# Altium PCB ECEN403_OfficialPCB.PcbDoc
Units mm, origin at the board's own origin, x right, y up, seen from the top; angles counter-clockwise.
Board outline 152.4 x 101.6 mm, 2 copper layers (Top Layer, Bottom Layer); 41 components, 39 nets, 149 pads, 20 vias.
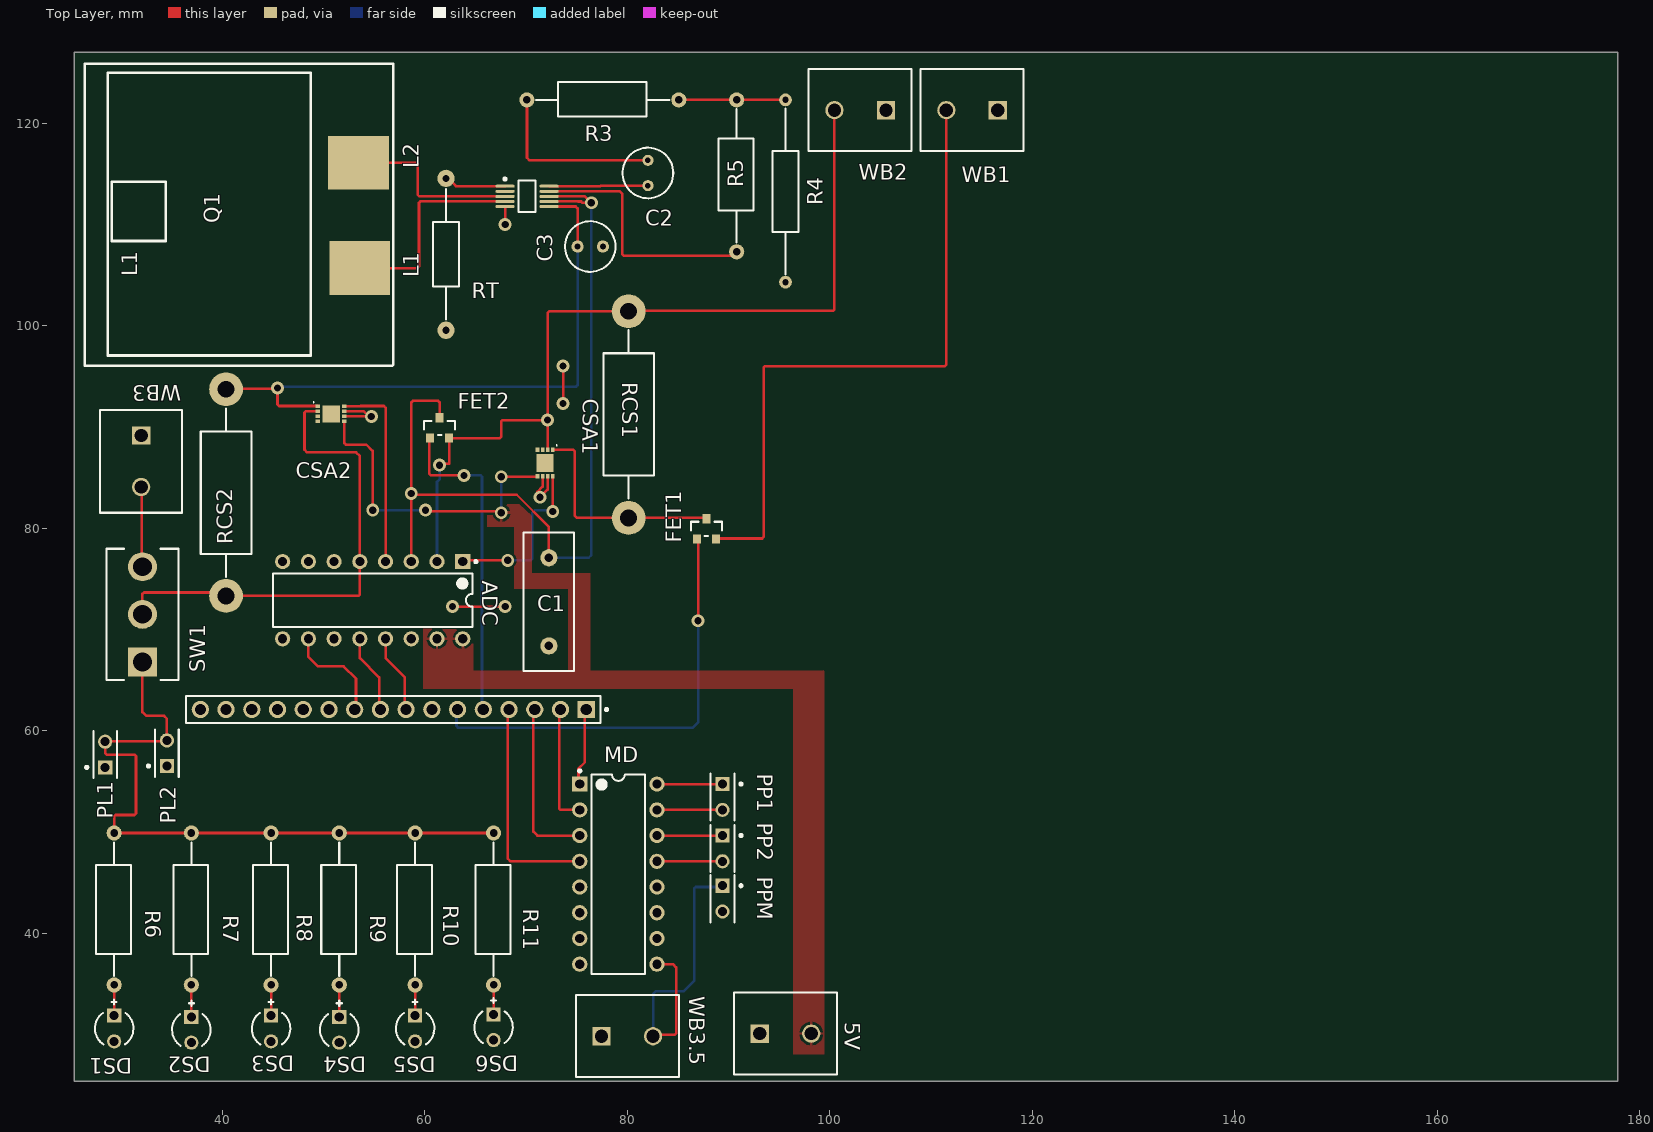
[diagram p0: Top Layer view]
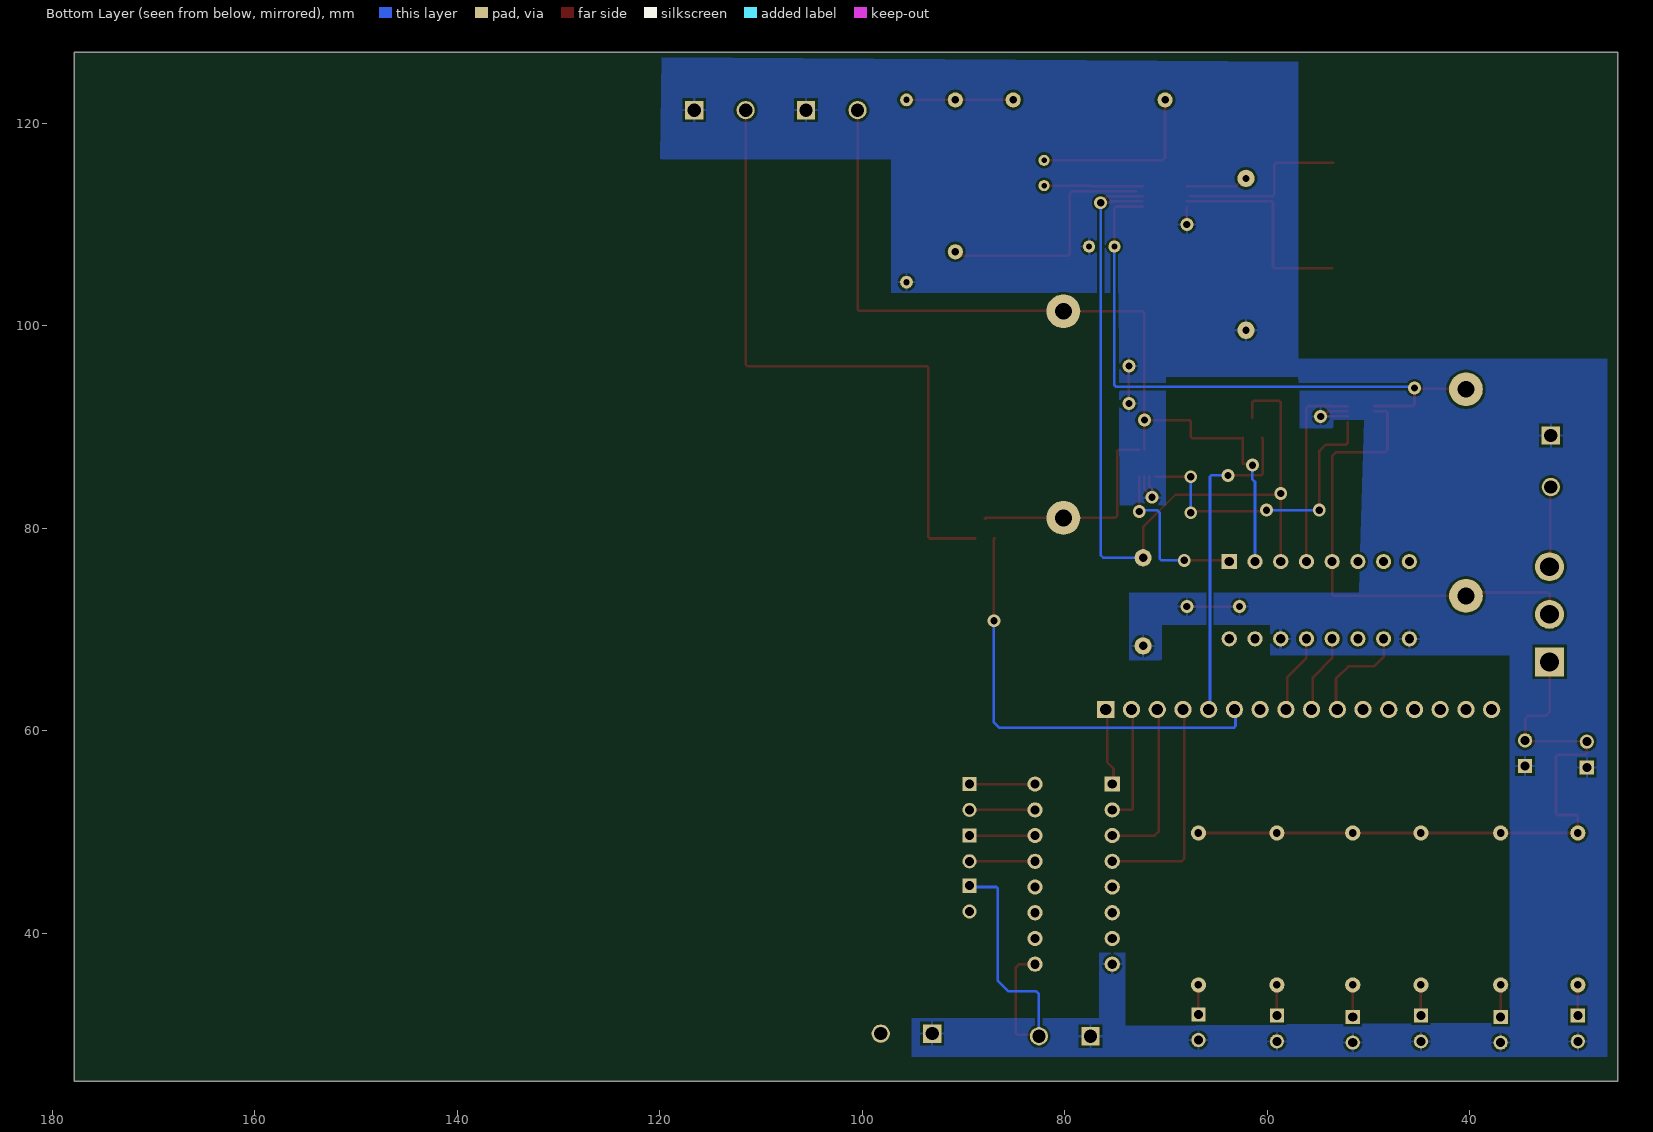
[diagram p1: Bottom Layer view, seen from below]

## Layer stack, top to bottom
Top Solder: solder mask 0.0102, Solder Resist, Dk 3.5
Top Layer: signal copper 0.0356
Dielectric 1: dielectric 0.32, FR-4, Dk 4.8
Bottom Layer: signal copper 0.0356
Bottom Solder: solder mask 0.0102, Solder Resist, Dk 3.5

## Board outline
25.4,25.4 177.8,25.4 177.8,127 25.4,127

## Design rules (kind name [scope] priority, off if disabled: settings)
Clearance [All] p1: gap=0.254 ignorepadtopadclearanceinfootprint=FALSE except(0: Arc-Hole Track-Hole SMDPad-Hole THPad-Hole Via-Hole Fill-Hole Poly-Hole Region-Hole Text-Hole; 0.15: Arc-Arc Arc-Track Arc-SMDPad Arc-THPad Track-Track Track-SMDPad Track-THPad SMDPad-SMDPad SMDPad-THPad THPad-THPad; 0.2: Arc-Via Track-Via SMDPad-Via THPad-Via Via-Via)
PolygonConnect [All] p1: connectstyle=Relief reliefconductorwidth=0.254 reliefentries=4 polygonreliefangle="90 Angle" airgapwidth=0.254
RoutingVias [All] p1: holewidth=0.711 width=1.27 viastyle="Through Hole" minholewidth=0.711 minwidth=1.27 maxholewidth=0.711 maxwidth=1.27
SilkToSolderMaskClearance [IsPad] p1: minsilkscreentomaskgap=0.03 clearancetoexposedcopper=TRUE
SolderMaskExpansion [All] p1: expansion=0.102 istentingtop=FALSE
Width [All] p1: maxlimit=0.254 minlimit=0.254 preferedwidth=0.254
29 further rules are at their usual default settings.

## Classes and differential pairs
component class ECEN403_Team_49_Schematic: 5V ADC C1 C2 C3 CSA1 CSA2 DS1 DS2 DS3 DS4 DS5 DS6 FET1 FET2 L1 MD PL1 PL2 PP1 PP2 PPM R3 R4 R5 R6 R7 R8 R9 R10 R11 RCS1 RCS2 RT SW1 WB2 WB3 WB3.5

## Components (designator, comment, footprint, x,y, rotation, side; value= is the part's Value field where it differs from the comment)
5V "1729128" "Wire To Board" 95.631,30.099 r0 top (schematic designator "5V Power Supply")
16PIN "61301611121" 16-FP-61301611121-MFG 56.896,62.103 r180 top
ADC "MCP3008-I/P" PDIP300-P16 54.864,72.898 r270 top (schematic designator "ADC Converter")
"Buck Boost" "LTC3440EMS#PBF" LT-MS-10_M 70.104,112.776 r0 top
C1 "1.5nF" "1.5nF Capacitor" 72.263,68.389 r90 top
C2 "10uF" "10uF Capacitor" 82.042,116.332 r270 top
C3 "22uF" "22uF Capacitor" 77.597,107.823 r180 top
CSA1 "Current Sense Amplifier" "Current Sense Amplifier" 71.886,86.452 r180 top
CSA2 "Current Sense Amplifier" "Current Sense Amplifier" 50.765,91.301 r270 top
DS1 "LTL-1CHE" INDPR60-254-520X380X650 29.337,30.607 r270 top
DS2 "LTL-1CHE" INDPR60-254-520X380X650 36.957,30.48 r270 top
DS3 "LTL-1CHE" INDPR60-254-520X380X650 44.831,30.607 r270 top
DS4 "LTL-1CHE" INDPR60-254-520X380X650 51.562,30.48 r270 top
DS5 "LTL-1CHE" INDPR60-254-520X380X650 59.055,30.607 r270 top
DS6 "LTL-1CHE" INDPR60-254-520X380X650 66.802,30.734 r270 top
FET1 "NTR4101PT1G" FP-318-08-MFG 87.82,79.946 r90 top
FET2 "NTR4101PT1G" FP-318-08-MFG 61.468,89.916 r90 top
L1 "10uH" "10uH Inductor" 53.594,105.697 r90 top
MD "ULN2003AN" N0016A 79.121,45.847 r0 top (schematic designator "Motor Driver")
PL1 "5-146280-2" TECO-5-146280-2_V 34.544,57.785 r90 top
PL2 "5-146280-2" TECO-5-146280-2_V 28.448,57.658 r90 top
PP1 "5-146280-2" TECO-5-146280-2_V 89.408,53.467 r270 top
PP2 "5-146280-2" TECO-5-146280-2_V 89.408,48.387 r270 top
PPM "5-146280-2" TECO-5-146280-2_V 89.408,43.434 r270 top
R3 "15K Resistor" "15k Resistor" 85.09,122.301 r180 top
R4 "200k" "200K - duplicate" 95.631,104.301 r90 top
R5 "400k" "400K Resistor" 90.805,122.301 r270 top
R6 "1k" PCBComponent_1#1 29.337,49.911 r270 top
R7 "1k" PCBComponent_1#1 36.957,49.911 r270 top
R8 "1k" PCBComponent_1#1 44.831,49.911 r270 top
R9 "1k" PCBComponent_1#1 51.562,49.911 r270 top
R10 "1k" PCBComponent_1#1 59.055,49.911 r270 top
R11 "1k" PCBComponent_1#1 66.802,49.911 r270 top
RCS1 "5m" "Current Sense" 80.137,81.026 r90 top
RCS2 "5m" "Current Sense" 40.386,93.726 r270 top
RT "60.4k" PCBComponent_1#2 62.103,99.554 r90 top
SW1 "A101SYCB04" FP-A101SYCB04-MFG 32.131,71.501 r180 top
WB1 "1729128" "Wire To Board" 114.046,121.285 r180 top
WB2 "1729128" "Wire To Board" 102.997,121.285 r180 top
WB3 "1729128" "Wire To Board" 32.004,86.614 r270 top
WB3.5 "1729128" "Wire To Board" 80.01,29.845 r0 top

## Footprints (in the part's own frame and the unit in brackets; to place one, negate y for a bottom-side part, rotate by r counter-clockwise, add the part's x,y. Pads: shape width x height; smd on the part's side, far side on the other; paste and mask are expansions set on the pad)
"1.5nF Capacitor" [mm]
  round 1.7 hole 0.85: 1(0,0) 2(8.7,0)
  silkscreen extent -2.5,-2.5 11.2,2.5
"10uF Capacitor" [mm]
  round 1.1 hole 0.55: 1(0,0) 2(2.5,0)
  silkscreen extent -1.25,-2.5 3.75,2.5
"10uH Inductor" [mm]
  rect 5.3x6 smd: 1(10.381,0.127) 2(0,0)
  silkscreen extent -9.65,-3.3 20.19,27.18
"15k Resistor" [mm]
  round 1.5 hole 0.75: 1(0,0) 2(15,0)
  silkscreen extent 0.93,-1.78 14.1,1.65
16-FP-61301611121-MFG [mm]
  rect 1.7x1.7 hole 1.1 paste-1000 mask+0: 1(-19.05,0)
  round 1.7 hole 1.1 paste-1000 mask+0: 2(-16.51,0) 3(-13.97,0) 4(-11.43,0) 5(-8.89,0) 6(-6.35,0) 7(-3.81,0) 8(-1.27,0) 9(1.27,0) 10(3.81,0) 11(6.35,0) 12(8.89,0) 13(11.43,0) 14(13.97,0) 15(16.51,0) 16(19.05,0)
  silkscreen extent -21.2,-1.35 20.47,1.35, body extent -20.57,-1.45 20.57,1.45, height 0.25
"22uF Capacitor" [mm]
  round 1.2 hole 0.6: 1(0,0) 2(2.5,0)
  silkscreen extent -1.25,-2.5 3.75,2.5
"200K - duplicate" [mm]
  round 1.26 hole 0.63: 1(0,0) 2(18,0)
  silkscreen extent 0.76,-1.27 17.14,1.27
"400K Resistor" [mm]
  round 1.5 hole 0.75: 1(0,0) 2(15,0)
  silkscreen extent 0.89,-1.78 14.1,1.65
"Current Sense" [mm]
  round 3.34 hole 1.67: 1(0,0) 2(20.4,0)
  silkscreen extent 1.91,-2.5 18.54,2.5
"Current Sense Amplifier" [mm]
  rect 0.35x0.45 smd: 1(-0.75,-1.305) 2(-0.25,-1.305) 3(0.25,-1.305) 4(0.75,-1.305) 5(0.75,1.305) 6(0.25,1.305) 7(-0.25,1.305) 8(-0.75,1.305)
  rect 1.67x1.76 smd: 9(0,0)
  silkscreen extent -1.19,-1.79 -1.09,-1.69, body extent -1.02,-1.52 1.03,1.53, height 0.75
FP-318-08-MFG [mm]
  rect 0.9x0.8 smd paste+0 mask+0: 1(-1,0.95) 2(-1,-0.95) 3(1,0)
  silkscreen extent -0.7,-1.52 0.7,1.52, body extent -1.55,-1.62 1.55,1.62, height 0.25
FP-A101SYCB04-MFG [mil]
  rect 112.37x112.37 hole 73 paste-39370.1 mask+0: 1(0,185)
  round 112.37 hole 73 paste-39370.1 mask+0: 2(0,0) 3(0,-185)
  silkscreen extent -140,-255 140,255, body extent -144,-259 144,259, height 10
INDPR60-254-520X380X650 [mm] "THD, 2-Leads, Dia 3.8mm, Pitch 2.54mm"
  rect 1.4x1.4 hole 0.9: 1(-1.27,0)
  round 1.4 hole 0.9: 2(1.27,0)
  silkscreen extent -2.87,-1.9 1.58,1.9, body extent -1.9,-1.9 1.9,1.9, height 6.5
LT-MS-10_M [mm] "SOP, 10-Leads, Body 3.1x3.1mm, Pitch 0.5mm, IPC Low Density"
  oval 1.9x0.3 smd: 1(-2.175,1) 2(-2.175,0.5) 3(-2.175,0) 4(-2.175,-0.5) 5(-2.175,-1) 6(2.175,-1) 7(2.175,-0.5) 8(2.175,0) 9(2.175,0.5) 10(2.175,1)
  silkscreen extent -2.3,-1.55 0.82,1.82, body extent -1.55,-1.55 1.55,1.55, height 1.1
N0016A [mm] "DIP, 16-Leads, Body 19.7x6.6mm, Pitch 2.54mm"
  rect 1.5x1.5 hole 0.9: 1(-3.81,8.89)
  round 1.5 hole 0.9: 2(-3.81,6.35) 3(-3.81,3.81) 4(-3.81,1.27) 5(-3.81,-1.27) 6(-3.81,-3.81) 7(-3.81,-6.35) 8(-3.81,-8.89) 9(3.81,-8.89) 10(3.81,-6.35) 11(3.81,-3.81) 12(3.81,-1.27) 13(3.81,1.27) 14(3.81,3.81) 15(3.81,6.35) 16(3.81,8.89)
  silkscreen extent -3.93,-9.85 2.65,10.31, body extent -3.95,-9.85 3.95,9.85, height 5.08
PCBComponent_1#1 [mm]
  round 1.5 hole 0.75: 1(0,0) 2(15,0)
  silkscreen extent 0.93,-1.78 14.1,1.65
PCBComponent_1#2 [mm]
  round 1.71 hole 0.7: 1(0,0) 2(15,0)
  silkscreen extent 1.08,-1.27 13.97,1.27
PDIP300-P16 [mm] "DIP, 16-Leads, Row Spacing 7.62mm, Pitch 2.54mm, Body 19.2x6.6mm"
  rect 1.5x1.5 hole 0.9: 1(-3.81,8.89)
  round 1.5 hole 0.9: 2(-3.81,6.35) 3(-3.81,3.81) 4(-3.81,1.27) 5(-3.81,-1.27) 6(-3.81,-3.81) 7(-3.81,-6.35) 8(-3.81,-8.89) 9(3.81,-8.89) 10(3.81,-6.35) 11(3.81,-3.81) 12(3.81,-1.27) 13(3.81,1.27) 14(3.81,3.81) 15(3.81,6.35) 16(3.81,8.89)
  silkscreen extent -3.93,-9.85 2.65,10.32, body extent -3.55,-9.85 3.55,9.85, height 5.34
TECO-5-146280-2_V [mm] "Connector, 2-Leads, Body 4.67x2.34mm, Pitch 2.54mm"
  rect 1.4x1.4 hole 0.89: 1(-1.27,0)
  round 1.4 hole 0.89: 2(1.27,0)
  silkscreen extent -2.33,-1.17 2.33,1.94, body extent -2.34,-1.17 2.34,1.17, height 5.33
"Wire To Board" [mm] "Receptacle, 2-Leads, Body 8.1x10.16mm, Pitch 5.08mm"
  rect 1.8x1.8 hole 1.3: 1(-2.54,0)
  round 1.8 hole 1.3: 2(2.54,0)
  silkscreen extent -5.08,-4.05 5.08,4.05, body extent -5.65,-4.05 5.08,4.05, height 10.01

## Part data
5V WB1 WB2 WB3 WB3.5: library part CMP-2000-05815-1, "PCB Terminal Block, 13.5 A, 400 V, 2-Pin THD, RoHS, Bulk", Current Rating=13500mA, Manufacturer="Phoenix Contact", Package Description="2-Pin Through Hole Device, Body 8.1 x 10.16 mm, Pitch 5.08 mm", Package Reference=1729128-2, Package Version=03/2015, Voltage Rating=400V, Datasheet URL=https://datasheet.ciiva.com/16046/1729128-16046181.pdf, Datasheet Version=12/2013, Manufacturer URL=http://www.phoenixcontact.com/, Mounting Technology=ThroughHole, No. of Positions=2, No. of Rows=1, Orientation=Horizontal, Package URL=https://www.phoenixcontact.com/online/portal/pi/pxc/product_detail_page/!ut/p/b1/3VdJjqNKFDxLH8AFycySyWY2ozFsEPOMMQaDOX1XedGL_1Vdm5YXJleknhSKeBkvI6EA8ncAo3AYoDhBQGco6KN7VURTdemj9us_IEKEZo_YHiPAEWEFmDGOHMORkqKYCORBZxgL7ZoaZYcbFFUZ3fqxSY6GOuxydWUuHqz1ynmMFygu583Bob0Ewr6Sd_l-5m-kAueHiB0jpRwZwe58wwtkpxtMYd_LmGcDRU02dRNEyWt6Y2ti5pSyJ_reIkzIulrqApdnbT11V5jnCKbYNCvhEM1MCpPByat_X379-iThf08CI5GfOPqfBeS3BRoBOdD55AKVv0iLwCMq-2BrzXWSGRH7pUGD9uwXQjiph3xL0DKQwdGa0JImiIOmBNOestqgwTHSSs2oOep-78apyXQBvNi8ZLaFjvjWvcaUEBu0MC6Wbe-d6mB0FAebo2lUWinqYaZs5DAYzV0RP9yitUjnGJ0iI9xhZkT42OCQNUJJhkgWINNQLP2JFP6OpMg3JCVg70jqHT0lvKOnhHf0lPuOnnLf0VPuWx6_dxwUIvwk5WMkT0kLL1mh61l2yZVSzG3pYV_bqo-mj6uMKwKwdnnW8Jh5RTOJzMOA5c-eJDaZQw4mTMPH02PvS_ZAqNVjVTo2WyYLkwH_KU1mmmG5kjRhDqPXLwwVHvVOjCM60-fpXvTDfMGW1PVFVS1r4e4yVDk4ZdNbkUHvqPqQSeian4UD39fNKmachqdJ1NJbyk8rXT9mXTvPk3oE5meulKGgiruPJek-4I9hTT6G8ZLOyRSm2RRVbThERQad5OS28hdt4YW4vG0stgYYzsWsK4_7y6DZMjJSCqri1kyiZR5vD7pwIrNR7QwPHTcLTI5qT7eRlpHrdGiupYlqQDJ7zy_CND8fWWBoLRXxk1RVcXiBQwbTD4Xi7KL-FuO94t9xaqweXzH, Packing=Bulk, PartNumber=1729128, Pitch=5.08mm, RoHS=TRUE
16PIN: library part CMP-1502-01095-2, "CONN HEADER VERT 16POS 2.54MM", Color=Black, Flammability Rating="UL94 V-0", Max Operating Temperature=105°C, Min Operating Temperature=-40°C, Voltage Rating=250V, Connector Type=Header, Contact Finish - Mating=GOLD, Contact Material="Copper Alloy", Contact Mating Length=0.236inch, Contact Plating=Gold, Contact Shape=Square, Contact Type="Male Pin", Fastening Type=Pull, Gender=Male, Insulation Color=Black, Insulation Material=Nylon, Mount="Through Hole", Number of Contacts=16, Number of Positions=16, Number of Rows=1, Packaging=Bulk, Pitch=0.1inch, RoHS Compliant=Yes, Series=WR-PHD, Termination=Solder
ADC: library part CMP-0188-00184-2, "2.7V 4-Channel/8-Channel 10-Bit A/D Converters with SPI Serial Interface, 16-Pin PDIP, Industrial Temperature", Code_JEDEC=MS-001-BB, ComponentLink1Description="Manufacturer URL", ComponentLink1URL=http://www.microchip.com/, ComponentLink2Description=Datasheet, ComponentLink2URL=http://ww1.microchip.com/downloads/en/DeviceDoc/21295d.pdf, ComponentLink3Description="Package Specification", ComponentLink3URL=http://www.microchip.com/stellent/groups/techpub_sg/documents/packagingspec/en012702.pdf, DatasheetVersion="revD, Dec-2008", PackageDescription="16-Lead Plastic Dual In-Line (P) - 300 mil Body [PDIP]", PackageReference=PDIP300-P16, PackageVersion="revBB, Aug-2009", RevisionNote="URLs added."
"Buck Boost": library part CMP-0492-01290-1, "Micropower Synchronous Buck-Boost DC/DC Converter, 10-pin SOP (MS-10), -40 to 85 degC, Pb-Free", Frequency Sync Range="300kHz - 2MHz", Manufacturer="Linear Technology", ComponentLink1Description="Manufacturer URL", ComponentLink1URL=http://www.linear.com/, ComponentLink2Description=Datasheet, ComponentLink2URL=http://cds.linear.com/docs/en/datasheet/3440fb.pdf, ComponentLink3Description="Package Specification", ComponentLink3URL=http://cds.linear.com/docs/en/packaging/05081661_F_MS.pdf, DatasheetVersion="Rev. B", Mounting Technology="Surface Mount", Number of Outputs=1, PackageDescription="10-Pin Plastic MSOP, Body 3 x 3 mm, Pitch 0.5 mm", PackageReference=MS-10, PackageVersion="Rev. E, 06/2010", PartNumber=LTC3440EMS#PBF, RoHS=TRUE
C2: library part "10uF Capacitor"
C3: library part "22uF Capacitor"
DS1 DS2 DS3 DS4 DS5 DS6: library part CMP-1674-00005-1, "Radial LED, 12.6 mcd, 20 mA, 2 V, -55 to 100 degC, 2-Pin THD, RoHS, Bulk", Case\Package=Radial, Current Rating="3.6 A", Max Operating Temperature="130 degC", Min Operating Temperature="-40 degC", Package Quantity=55, Resistance="0.045 Ohm", Tolerance=20%, ComponentLink1Description="Manufacturer URL", ComponentLink1URL=http://www.us.liteon.com/, ComponentLink2Description=Datasheet, ComponentLink2URL=https://datasheet.ciiva.com/15117/getdatasheetpartid-187746-15117985.pdf, DatasheetVersion=Dec-03, Height="1.1 inch", Lead Pitch="11.44 mm", Length="0.97 inch", Mount="Through Hole", PackageDescription="2-Pin Through Hole Device, Dia 3.8 mm, Pitch 2.54 mm", PackageReference=LTL-1CHE, Packaging=Tray, Radiation Hardening=No, RoHSCompliant=true, Shielding=Unshielded, Width="0.62 inch"
FET1 FET2: library part CMP-1058-00754-2, "MOSFET P-CH 20V 1.8A SOT-23", Case/Package=SOT-23-3, Continuous Drain Current (ID)=-3.2A, Drain to Source Breakdown Voltage=-20V, Drain to Source Resistance=112mR, Drain to Source Voltage (Vdss)=20V, Gate to Source Voltage (Vgs)=8V, Input Capacitance=675pF, Max Operating Temperature=150°C, Max Power Dissipation=730mW, Min Operating Temperature=-55°C, On-State Resistance=70MR, Package Quantity=1, Threshold Voltage=-720mV, Contact Plating=Tin, Current Rating=-3.2A, Element Configuration=Single, Fall Time=12.6ns, Height=0.94mm, Lead Free="Lead Free", Length=2.9mm, Nominal Vgs=-720mV, Number of Elements=1, Number of Pins=3, Packaging="Tape and Reel", Power Dissipation=730mW, Radiation Hardening=No, Rds On Max=85mR, REACH SVHC="No SVHC", Rise Time=12.6ns, Turn-Off Delay Time=30.2ns, Turn-On Delay Time=7.5ns, Voltage Rating (DC)=-20V, Width=1.3mm
L1: library part "10uH Inductor"
MD: library part CMP-2000-07352-1, "High-Voltage, High-Current Darlington Transistor Array, 50 V, 500 mA, -20 to 70 degC, 16-Pin PDIP (N), Pb-Free (RoHS), Tube", Manufacturer=TexasInstruments, Maximum Collector Emitter Saturation Voltage=1.1@100mA|1.3@200mA|1.6@350mAV, Maximum Collector Emitter Voltage=50V, Package=16PDIP, Package Description="16-Pin Plastic In-Line, Body 19.305 x 6.35 mm, Pitch 2.54 mm", Package Reference=N16, Package Version="4040049/E, 12/2002", Peak DC Collector Current=0.5A, Category=DarlingtonBJT, Configuration=Array7, Datasheet URL=http://www.ti.com/general/docs/lit/getliterature.tsp?genericPartNumber=uln2003a&fileType=pdf, Datasheet Version="Rev. O, 01/2016", Manufacturer URL=http://www.ti.com/, Mounting=ThroughHole, Mounting Technology=ThroughHole, Package URL=http://www.ti.com/litv/pdf/mpdi002c, Packaging=Rail/Tube, Rad Hard=No, Type=NPN
PL1 PL2 PP1 PP2 PPM: library part CMP-2000-07492-1, "Male Header, Pitch 2.54 mm, 1 x 2 Position, Height 8.21 mm, Tail Length 3.05 mm, -65 to 105 degC, RoHS, Bulk", Case\/Package=100, Colour=Black, Current Rating=3A, Flammability Rating=UL94V-0, High Temperature Housing=Yes, Manufacturer="TE Connectivity", Max Current Rating=5A, Max Operating Temperature=105degC, Min Operating Temperature=-65degC, Package Description="Male Header, Pitch 2.54 mm, 1 x 2 Position, Height 8.21 mm, Tail Length 3.05 mm", Package Quantity=500, Approvals=CSA, Board Standoff=No(Without), Connector Type=Header, Contact Gender=Male, Contact Material=CopperAlloy, Contact Mating Length=0.23inch, Contact Plating=Matte, Contact Protection=No(Without), Contact Shape=Square, Datasheet URL=http://www.te.com/commerce/DocumentDelivery/DDEController?Action=showdoc&DocId=Customer+Drawing%7F146280%7FH1%7Fpdf%7FEnglish%7FENG_CD_146280_H1.pdf%7F5-146280-2, Datasheet Version="Rev. H1, 08/2016", Depth=2.34mm, Gasket=No(Without), High Speed Serial Data Connector=No, Housing Colour=Black, Housing Material=Polymer, Keyed=No, Length=4.67mm, Manufacturer URL=http://www.te.com/, Mating Alignment=No(Without), Mating Connector Lock=No(Without), Mating Post Length=0.23inch, Mount=ThroughHole, Mounting Technology=ThroughHole, Number of Contacts=2, Number of Positions=2, Number of Rows=1, Orientation=Straight, Package Reference=5-146280-2, Packaging=Carton, Panel Mount Retention=No(Without), PCB Mount Retention=Without, PCB Mounting Orientation=Vertical, PCB Thickness=0.063inch, Pitch=2.54mm, Radiation Hardening=No, RoHSCompliant=true, Row Spacing=2.54mm, Selectively Loaded=No(Without), Stabilizers=No(Without), Termination=ThroughHole, Termination Post Length=0.12inch
R4: library part "200k Resistor"
R5: library part "400k Resistor"
R6 R7 R8 R9 R10 R11: library part "1k Resistor"
RCS1 RCS2: library part "Current Sense Resistor"
RT: library part "60.4k Resistor"
SW1: library part CMP-03408-000017-1, "SWITCH TOGGLE SPDT 0.4VA 20V", Actuator Color=Chrome, Contact Current Rating=400mA, Contact Resistance=10mR, Flammability Rating="UL94 V-1", Insulation Resistance=30MR, Max Operating Temperature=85°C, Max Voltage Rating (AC)=20V, Min Operating Temperature=-30°C, Package Quantity=100, Power Rating=400mW, Actuator Length=10.41mm, Actuator Material=Phenolic, Actuator Type="Standard Round", Contact Material=Copper, Contact Plating=Gold, Depth=6.86mm, Electrical Life=6000Cycles, ELV=Compliant, Illumination Type=Non-Illuminated, Lead Free="Lead Free", Max Voltage Rating (DC)=20V, Mount=Panel, Number of Poles=1, Number of Positions=2, Orientation=Straight, Packaging=Bulk, Radiation Hardening=No, REACH SVHC="No SVHC", RoHS Compliant=Yes, Series="Gemini A", Switch Function=On-On, Termination="PC Pins", Throw Configuration=SPDT, Voltage Rating (AC)=20V, Voltage Rating (DC)=20V

## Via types
v1: diameter 1.27, hole 0.711, Top Layer to Bottom Layer, 19 vias
v2: diameter 1.27/1.27 (per signal layer), hole 0.711, Top Layer to Bottom Layer, 1 vias

## Nets (pads, with @x,y where several pads share a name; then routed paths per layer and width w, separated by ;. In a path a pad name is that pad's centre, name@x,y a point inside that pad or via, vN(x,y) a via of type N, cw(c..) or ccw(c..) an arc to the next point about the centre after c; other vN are vias at no path point)
5V: 5V.2 ADC.15 ADC.16 CSA1.5 CSA2.5 | length 30.8
  Top Layer w0.254: CSA2.5@52.07,90.456 52.07,88.414 52.219,88.265 54.229,88.265 54.864,87.63 v1(54.864,81.788) ; v1(60.071,81.788) 60.198,81.661 67.437,81.661 v1(67.564,81.534) ; v1(67.564,85.09) CSA1.5@71.001,85.09
  Bottom Layer w0.254: v1(54.864,81.788) v1(60.071,81.788) ; v1(67.564,81.534) v1(67.564,85.09)
GND: 5V.1 "Buck Boost.5" ADC.9 ADC.14 C1.1 C3.1 CSA1.6 CSA1.7 CSA2.6 CSA2.7 DS1.2 DS2.2 DS3.2 DS4.2 DS5.2 DS6.2 MD.8 PL1.1 PL2.1 R4.1 RT.1 WB1.1 WB2.1 WB3.1 WB3.5.1 | length 21
  Top Layer w0.254: DS4.2@51.498,29.273 DS4.2 DS4.2@51.625,29.273 ; CSA2.6 v1@54.491,91.051 ; CSA2.7@52.084,91.543 53.999,91.543 v1@54.491,91.051 ; v1(54.729,91.051) v1@54.491,91.051 ; DS5.2@58.991,29.273 DS5.2 ; v1(62.738,72.263) v1(67.945,72.263) ; DS6.2@66.484,29.146 DS6.2@66.548,29.21 ; v1(67.945,109.982) 67.945,111.677 ; CSA1.6 71.636,84.103 71.12,83.587 71.374,83.333 v1(71.374,83.058) 72.132,83.816 CSA1.7@72.132,85.147 ; v1(73.66,92.329) v1(73.66,96.012)
Net16PIN_1: 16PIN.1 MD.1 | length 8.1
  Top Layer w0.254: MD.1 75.184,54.864 75.184,56.261 75.819,56.896 16PIN.1@75.819,62.484
Net16PIN_2: 16PIN.2 MD.2 | length 12.2
  Top Layer w0.254: 16PIN.2@73.279,62.484 73.279,52.346 73.428,52.197 MD.2
Net16PIN_3: 16PIN.3 MD.3 | length 17.2
  Top Layer w0.254: 16PIN.3@70.739,62.484 70.739,50.038 71.12,49.657 MD.3
Net16PIN_4: 16PIN.4 MD.4 | length 22.3
  Top Layer w0.254: 16PIN.4@68.199,62.484 68.199,47.371 68.453,47.117 MD.4
Net16PIN_5: 16PIN.5 FET2.1 | length 31.5
  Top Layer w0.254: FET2.1 60.452,88.85 60.452,85.366 60.601,85.217 v1(63.881,85.217)
  Bottom Layer w0.254: v1(63.881,85.217) 65.278,85.217 65.3,85.239 65.51,85.239 65.659,85.09 16PIN.5@65.659,62.484
Net16PIN_6: 16PIN.6 FET1.1 | length 44.3
  Top Layer w0.254: FET1.1@86.934,79.01 86.995,78.949 v2(86.995,70.866)
  Bottom Layer w0.254: 16PIN.6@63.119,62.484 63.137,62.466 63.137,60.474 63.286,60.325 86.487,60.325 86.995,60.833 v2(86.995,70.866)
Net16PIN_8: 16PIN.8 ADC.13 | length 7.6
  Top Layer w0.254: ADC.13 56.134,67.183 58.039,65.278 16PIN.8@58.039,62.484
  Bottom Layer w0.254: ADC.13@56.007,68.961 ADC.13
Net16PIN_9: 16PIN.9 ADC.12 | length 7.6
  Top Layer w0.254: ADC.12 53.594,67.183 55.499,65.278 16PIN.9@55.499,62.484
  Bottom Layer w0.254: ADC.12@53.467,68.961 ADC.12
Net16PIN_10: 16PIN.10 ADC.10 | length 10.1
  Top Layer w0.254: ADC.10 48.514,67.312 49.464,66.362 52.002,66.362 53.213,65.151 53.213,62.738 16PIN.10@52.959,62.484
"NetADC Converter_1": ADC.1 CSA1.8 | length 17.2
  Top Layer w0.254: ADC.1 63.881,76.835 v1(68.199,76.835) ; CSA1.8 72.64,85.143 72.64,81.665 v1(72.644,81.661)
  Bottom Layer w0.254: v1(68.199,76.835) 70.463,76.835 70.612,76.984 70.612,81.512 70.888,81.788 72.517,81.788 v1(72.644,81.661)
"NetADC Converter_2": ADC.2 CSA1.2 FET2.2 RCS1.2 WB2.2 | length 86.2
  Top Layer w0.254: v1(61.468,86.233) 61.617,86.382 62.418,86.382 FET2.2 62.434,88.9 67.415,88.9 67.564,89.049 67.564,90.297 67.542,90.319 67.542,90.529 67.691,90.678 v1(72.136,90.678) ; CSA1.2 v1(72.136,90.678) ; WB2.2 100.457,101.622 100.308,101.473 80.184,101.473 RCS1.2 72.285,101.426 72.136,101.277 v1(72.136,90.678)
  Bottom Layer w0.254: ADC.2 61.214,84.582 61.468,84.836 v1(61.468,86.233)
"NetADC Converter_3": "Buck Boost.7" "Buck Boost.8" ADC.3 C1.2 FET2.3 | length 85.8
  Top Layer w0.254: ADC.3 v1(58.674,83.439) ; FET2.3 61.468,92.434 61.319,92.583 58.823,92.583 58.674,92.434 v1(58.674,83.439) ; C1.2 72.263,80.137 69.088,83.312 58.801,83.312 v1(58.674,83.439) ; 72.279,112.776 75.819,112.776 v1(76.454,112.141) 75.565,112.141 75.438,112.268 75.135,112.268 75.119,112.284 72.369,112.284
  Bottom Layer w0.254: C1.2 76.2,77.089 76.454,77.343 v1(76.454,112.141)
"NetADC Converter_4": ADC.4 CSA2.8 | length 19.3
  Top Layer w0.254: CSA2.8 53.651,92.051 53.675,92.075 55.961,92.075 56.134,91.902 ADC.4
"NetADC Converter_5": ADC.5 CSA2.2 RCS2.2 SW1.2 | length 48.6
  Top Layer w0.254: SW1.2@32.385,71.755 SW1.2 32.131,73.511 32.28,73.66 40.052,73.66 RCS2.2 53.445,73.326 53.594,73.475 ADC.5 53.594,87.122 53.213,87.503 48.387,87.503 48.133,87.757 48.133,91.418 48.282,91.567 49.444,91.567 CSA2.2 ; RCS2.2@41.108,72.397 RCS2.2@41.148,72.357
"NetBuck Boost_1": "Buck Boost.1" RT.2 | length 6.2
  Top Layer w0.254: RT.2 62.295,114.554 63.073,113.776 67.929,113.776 67.92,113.785
"NetBuck Boost_3": "Buck Boost.3" L1.1 | length 17.2
  Top Layer w0.254: L1.1 59.16,116.078 59.309,115.929 59.309,112.933 59.458,112.784 67.588,112.784
"NetBuck Boost_4": "Buck Boost.4" L1.2 | length 20.7
  Top Layer w0.254: L1.2 59.287,105.697 59.436,105.846 59.436,112.127 59.585,112.276 67.929,112.276
"NetBuck Boost_6": "Buck Boost.6" C3.2 CSA2.1 RCS2.1 | length 60.9
  Top Layer w0.254: RCS2.1 40.45,93.789 45.402,93.789 v1(45.466,93.853) 45.466,92.224 45.615,92.075 CSA2.1@49.46,92.075 ; 72.279,111.776 74.908,111.776 75.097,111.587 C3.2
  Bottom Layer w0.254: v1@45.466,93.98 74.948,93.98 75.097,94.129 C3.2
"NetBuck Boost_9": "Buck Boost.9" R5.2 | length 24.3
  Top Layer w0.254: 72.927,113.284 79.257,113.284 79.502,113.039 79.502,107.069 79.651,106.92 R5.2@91.059,106.92
"NetBuck Boost_10": "Buck Boost.10" C2.2 | length 9.8
  Top Layer w0.254: 72.279,113.776 72.295,113.792 77.352,113.792 77.392,113.832 C2.2
NetC2_1: C2.1 R3.2 | length 17.8
  Top Layer w0.254: R3.2 70.104,122.287 70.104,116.586 70.358,116.332 C2.1
NetCSA1_1: CSA1.1 FET1.3 RCS1.1 | length 21.8
  Top Layer w0.254: CSA1.1 74.654,87.757 74.803,87.608 74.803,81.28 75.057,81.026 RCS1.1 87.868,81.026 87.884,81.01 FET1.3
NetDS1_1: DS1.1 R6.2 | length 3
  Top Layer w0.254: DS1.1 R6.2
NetDS2_1: DS2.1 R7.2 | length 3.2
  Top Layer w0.254: DS2.1 R7.2
NetDS3_1: DS3.1 R8.2 | length 3
  Top Layer w0.254: DS3.1 R8.2
NetDS4_1: DS4.1 R9.2 | length 3.3
  Top Layer w0.254: R9.2 DS4.1 DS4.1@51.689,31.877
NetDS5_1: DS5.1 R10.2 | length 3
  Top Layer w0.254: DS5.1 R10.2
NetDS6_1: DS6.1 R11.2 | length 2.9
  Top Layer w0.254: DS6.1 R11.2
NetFET1_2: FET1.2 WB1.2 | length 64.7
  Top Layer w0.254: FET1.2@88.834,79.01 88.85,78.994 93.323,78.994 93.472,79.143 93.472,95.863 93.621,96.012 111.357,96.012 111.506,96.161 WB1.2
"NetMotor Driver_9": MD.9 PPM.1 WB3.5.2 | length 31.8
  Top Layer w0.254: WB3.5.2 82.677,29.972 84.687,29.972 84.836,30.121 84.836,36.652 84.531,36.957 MD.9
  Bottom Layer w0.254: WB3.5.2 82.55,34.014 82.826,34.29 85.598,34.29 86.614,35.306 86.614,44.428 86.763,44.577 89.281,44.577 PPM.1
"NetMotor Driver_13": MD.13 PP2.2 | length 6.5
  Top Layer w0.254: MD.13 PP2.2
"NetMotor Driver_14": MD.14 PP2.1 | length 6.5
  Top Layer w0.254: MD.14 PP2.1
"NetMotor Driver_15": MD.15 PP1.2 | length 6.5
  Top Layer w0.254: MD.15 PP1.2
"NetMotor Driver_16": MD.16 PP1.1 | length 6.5
  Top Layer w0.254: MD.16 PP1.1
NetPL1_2: PL1.2 PL2.2 R6.1 R7.1 R8.1 R9.1 R10.1 R11.1 SW1.1 | length 67.3
  Top Layer w0.254: SW1.1 32.131,61.849 32.512,61.468 34.268,61.468 34.544,61.192 PL1.2 34.48,58.991 28.511,58.991 PL2.2 28.448,57.807 28.597,57.658 31.347,57.658 31.496,57.509 31.496,51.838 31.347,51.689 29.486,51.689 29.337,51.54 R6.1 R7.1 R8.1 R9.1 R10.1 R11.1
NetR3_1: R3.1 R4.2 R5.1 | length 10.5
  Top Layer w0.254: R3.1 R5.1 R4.2
NetSW1_3: SW1.3 WB3.2 | length 7.9
  Top Layer w0.254: WB3.2 32.067,84.01 32.067,76.263 SW1.3
pads on no net: 16PIN.7 16PIN.11 16PIN.12 16PIN.13 16PIN.14 16PIN.15 16PIN.16 "Buck Boost.2" ADC.6 ADC.7 ADC.8 ADC.11 CSA1.3 CSA1.4 CSA1.9 CSA2.3 CSA2.4 CSA2.9 MD.5 MD.6 MD.7 MD.10 MD.11 MD.12 PPM.2

## Polygon pours and split planes (outlines as drawn)
GND on Bottom Layer "GND_L02_P000" (solid, pour order 0): 26.416,96.751 38.902,96.751 56.942,96.751 56.942,126.054 119.789,126.492 119.932,116.459 97.155,116.459 97.155,103.251 74.676,103.251 74.55,82.296 70.045,82.296 70.045,94.958 62.729,94.958 56.942,94.958 56.781,93.624 56.781,89.878 53.485,89.878 53.49,90.716 52.495,90.73 50.411,90.716 50.935,73.622 73.633,73.622 73.633,69.63 73.633,66.98 70.429,66.956 70.429,70.485 59.69,70.485 59.69,67.486 36.068,67.486 36.068,31.217 74.041,30.857 74.041,38.087 74.676,38.087 76.581,38.087 76.581,31.603 95.123,31.603 95.123,27.813 26.416,27.813
5V on Top Layer "5V_L01_P002" (solid, pour order 2): 70.585,75.565 70.585,81.258 69.342,82.36 66.184,82.36 66.184,80.159 68.851,80.117 68.851,74.041 74.168,74.041 74.168,65.911 64.77,65.911 64.77,69.979 59.834,70.113 59.834,64.135 96.388,64.135 96.388,31.601 96.388,28.069 97.172,28.069 97.912,28.069 99.459,28.069 99.459,65.966 76.327,65.916 76.327,75.565

## Text inside footprints (layer, text, board x,y; h text height)
L1: Top Overlay "Q1" at 39.751,110.142 h1.52 r90; Top Overlay "L2" at 59.436,115.57 h1.52 r90